# Altium PCB Node_ADE.PcbDoc
Units mil, origin at the board's own origin, x right, y up, seen from the top; angles counter-clockwise.
Board outline 4090 x 5110 mil, 2 copper layers (Top Layer, Bottom Layer); 40 components, 34 nets, 123 pads, 0 vias.
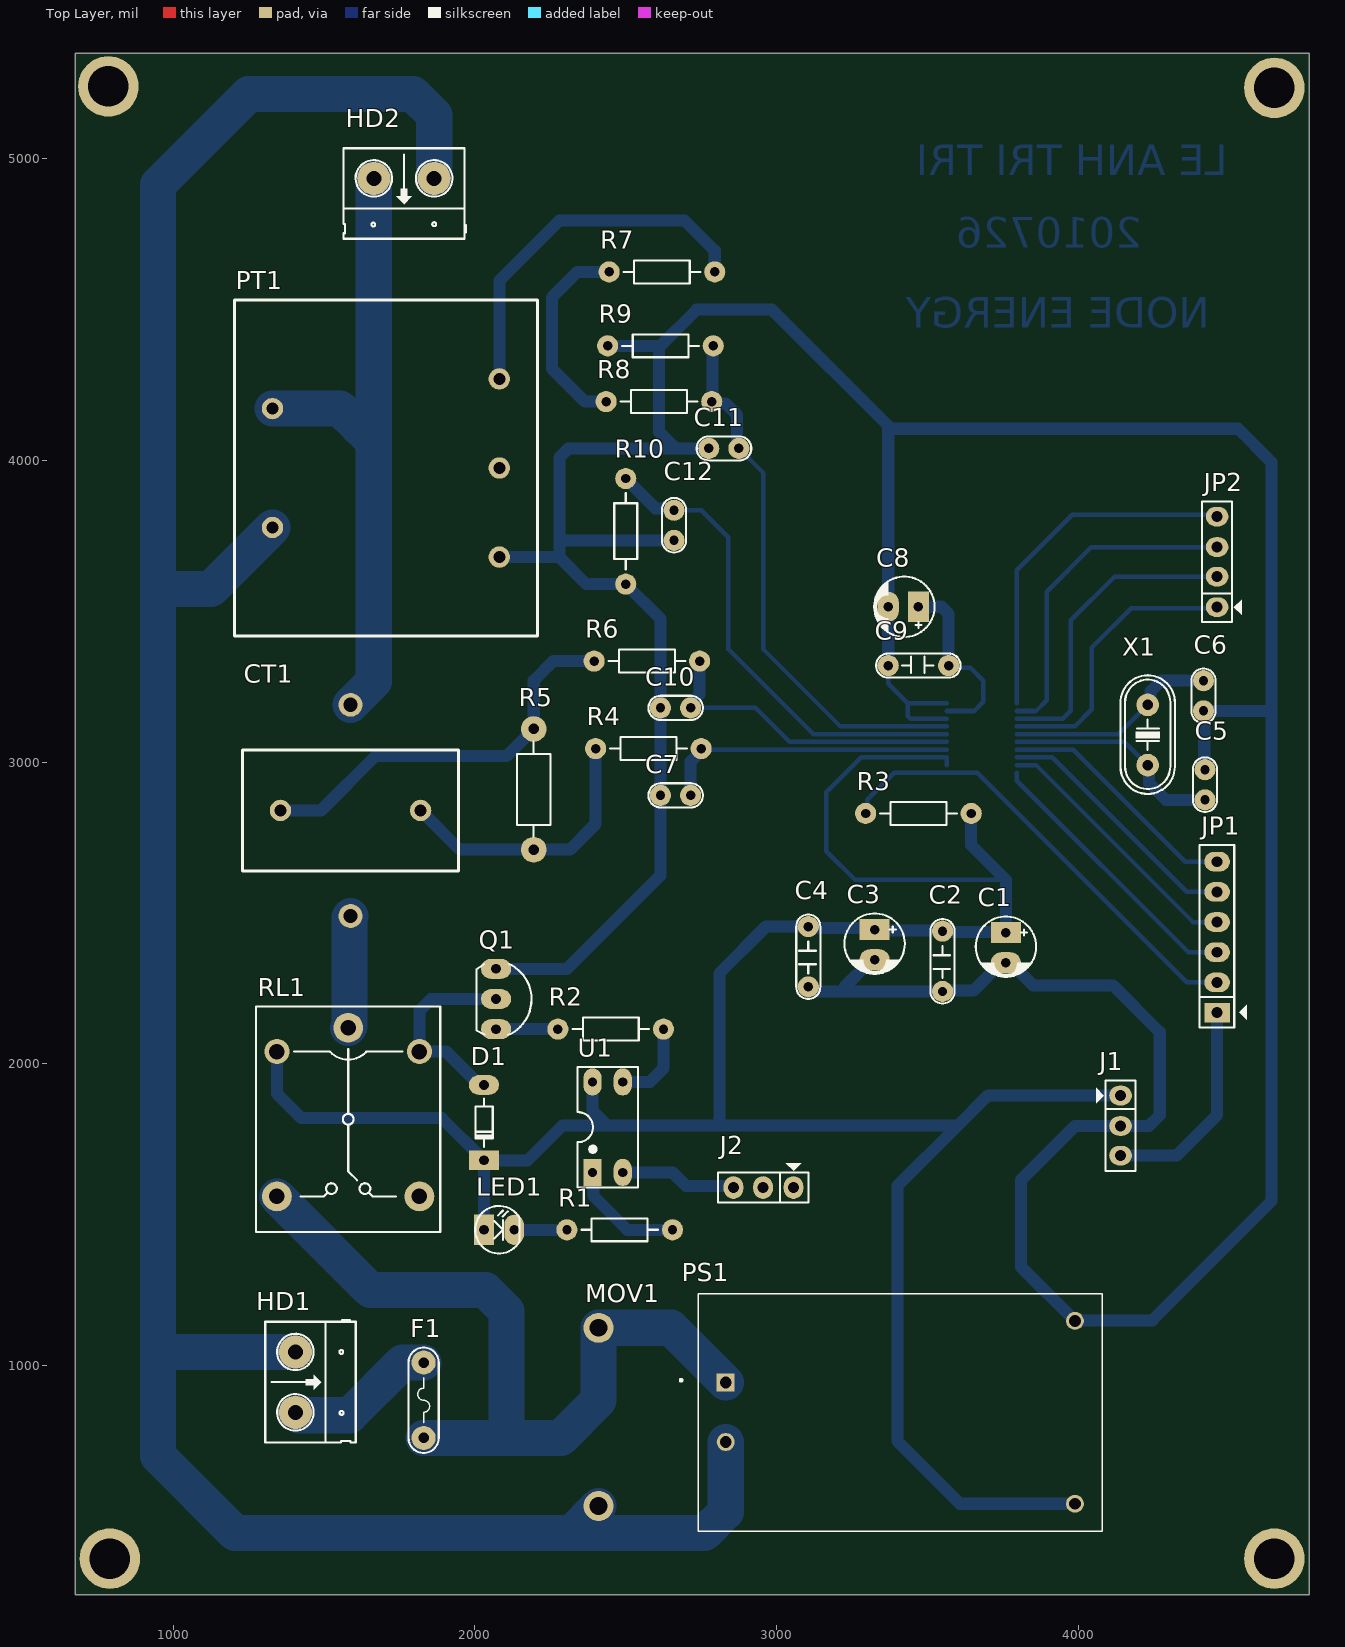
[diagram p0: Top Layer view]
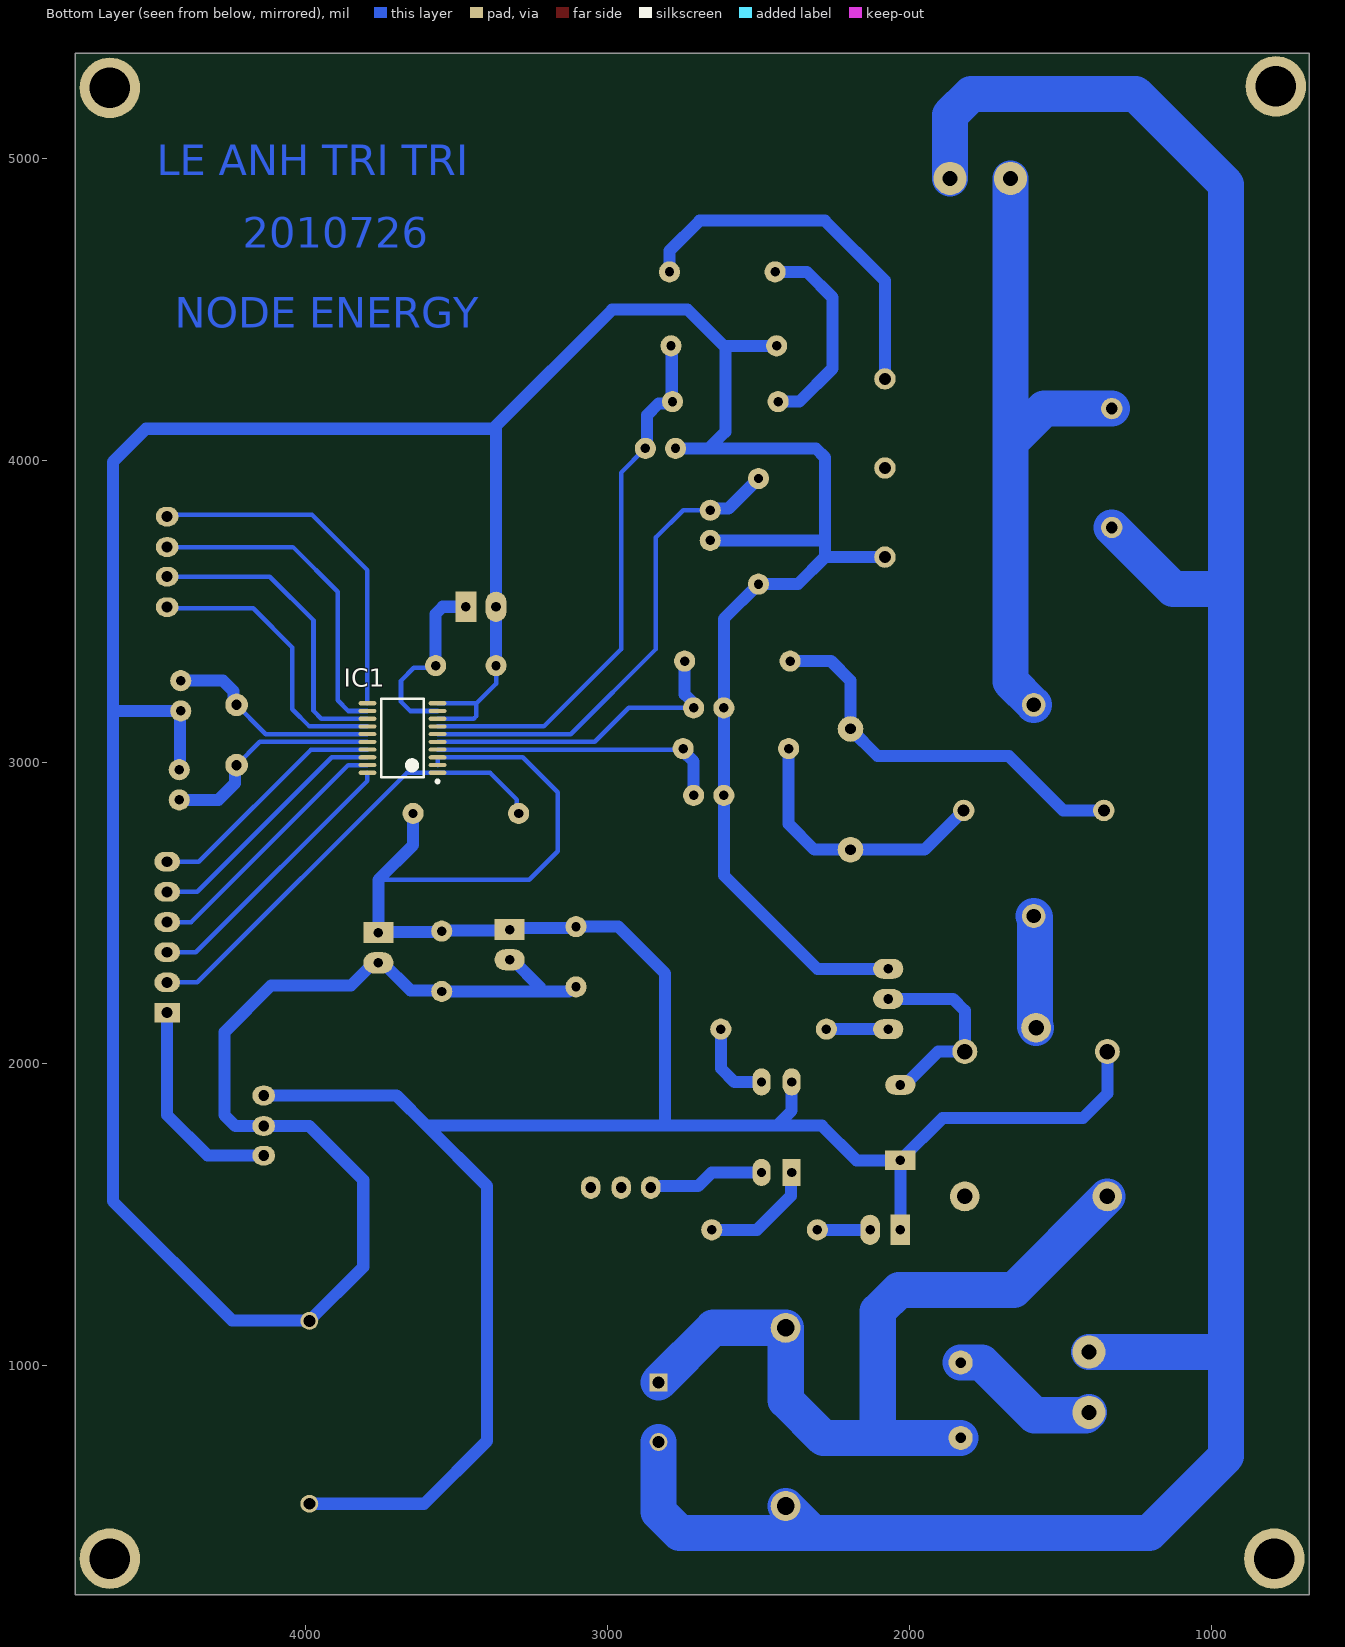
[diagram p1: Bottom Layer view, seen from below]
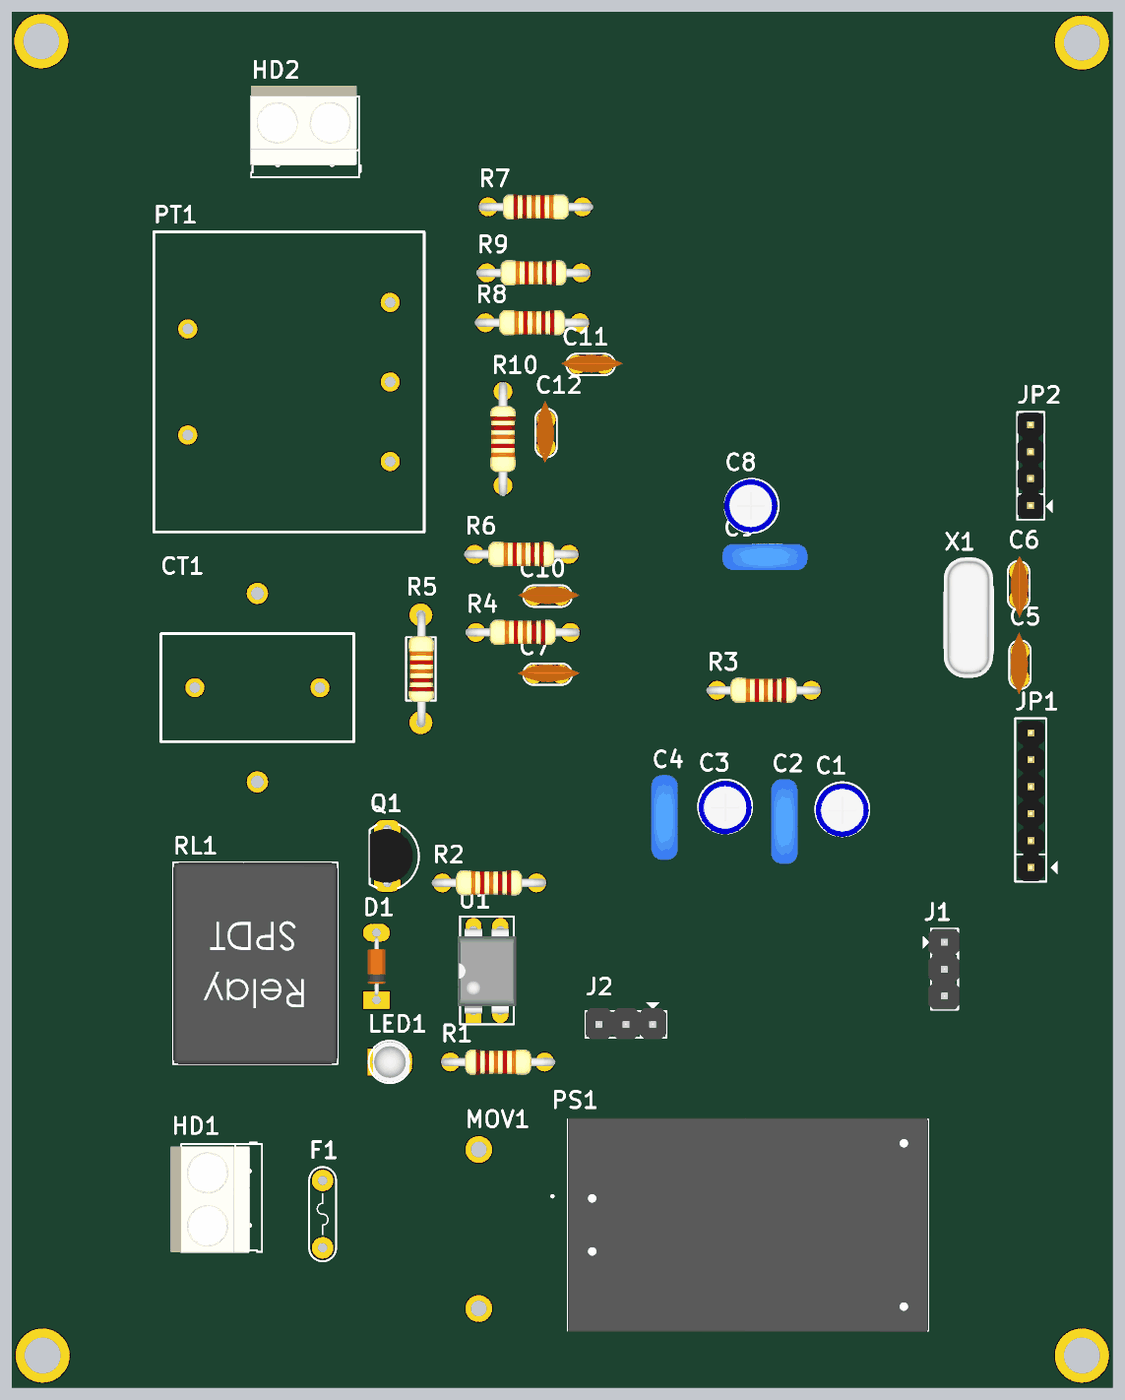
[diagram p2: 3D render of the assembled board from above, using the file's embedded part models]

## Layer stack, top to bottom
Top Solder: solder mask 0.4, Solder Resist, Dk 3.5
Top Layer: signal copper 1.4
Dielectric 1: dielectric 12.6, FR-4, Dk 4.8
Bottom Layer: signal copper 1.4
Bottom Solder: solder mask 0.4, Solder Resist, Dk 3.5

## Board outline
675,240 4765,240 4765,5350 675,5350

## Design rules (kind name [scope] priority, off if disabled: settings)
Clearance [All] p1: gap=10 ignorepadtopadclearanceinfootprint=FALSE except(0: Arc-Hole Track-Hole SMDPad-Hole THPad-Hole Via-Hole Fill-Hole Poly-Hole Region-Hole Text-Hole)
PolygonConnect [All] p1: connectstyle=Relief reliefconductorwidth=10 reliefentries=4 polygonreliefangle="90 Angle" airgapwidth=10
RoutingVias [All] p1: holewidth=28 width=50 viastyle="Through Hole" minholewidth=28 minwidth=50 maxholewidth=28 maxwidth=50
SolderMaskExpansion [All] p1: expansion=4 istentingtop=FALSE
Width [All] p1: maxlimit=200 minlimit=15 preferedwidth=40
30 further rules are at their usual default settings.

## Components (designator, comment, footprint, x,y, rotation, side; value= is the part's Value field where it differs from the comment)
C1 "10uF" CP1/2 3760,2435 r270 top value=10uF/50V
C2 "104" CN2 3550,2240 r90 top value=0.1uF
C3 "10uF" CP1/2 3325,2445 r270 top value=10uF/50V
C4 "104" CN2 3105,2255 r90 top value=0.1uF
C5 "22pF" CN1 4420,2875 r90 top value=33pF
C6 "22pF" CN1 4415,3270 r270 top value=33pF
C7 "33nF" CN1 2615,2890 r0 top value=33pF
C8 "10uF" CP1/2 3470,3515 r180 top value=10uF/50V
C9 "104" CN2 3370,3320 r0 top value=0.1uF
C10 "33nF" CN1 2615,3180 r0 top value=33pF
C11 "33nF" CN1 2775,4040 r0 top value=33pF
C12 "33nF" CN1 2660,3735 r90 top value=33pF
CT1 "ZMCT103C" ZMCT103C 1587.72,2840 r180 top
D1 "1N4148" D0.5A 2030,1805 r90 top
F1 "F3A" FUSE2 1830,1010 r270 top value=Fuse
HD1 "Header 2" HED2 1405,1045 r270 top
HD2 "Header 2" HED2 1865,4935 r180 top
IC1 "ADE7753" TSOP65-20BN 3680,3080 r0 bottom
J1 "Jumper 3" JP3 4140,1795 r270 top value=J3
J2 "Jumper 3" JP3 2956,1590 r180 top value=J3
JP1 "JP6 PIN" JP6 4460,2170 r90 top value=JP7
JP2 "JP4 PIN" JP4 4460,3614 r90 top value=JP4
LED1 "LED" LED-3 2030,1450 r0 top value="LED 3 ly Single Colour"
MOV1 "0.1uF 275V" CAP_1uF 2410,1125 r270 top value=0.1uF
PS1 "HLK-PM01" CONV_HLK-PM01 3410,845 r0 top
PT1 "ZN28120BA1" ZN28120BA1 1705,3975 r0 top
Q1 "C1815" QTO-92 2070,2215 r270 top
R1 "1k" R1/4W 2655,1450 r180 top value="R1/4W - 1K"
R2 "1k" R1/4W 2275,2115 r0 top value="R1/4W - 1K"
R3 "1k" R1/4W 3295,2830 r0 top value="R1/4W - 1K"
R4 "1k" R1/4W 2400,3045 r0 top value="R1/4W - 1K"
R5 "10R" R1/2W 2195,3110 r270 top value="R1/4W - 1K"
R6 "1k" R1/4W 2395,3335 r0 top value="R1/4W - 1K"
R7 "47k" R1/4W 2795,4625 r180 top value="R1/4W - 1K"
R8 "47k" R1/4W 2435,4195 r0 top value="R1/4W - 1K"
R9 "1k" R1/4W 2440,4380 r0 top value="R1/4W - 1K"
R10 "1k" R1/4W 2500,3590 r90 top value="R1/4W - 1K"
RL1 "Relay 10A/12V" RL_SPDT_10A 1580,1840 r270 top value="Relay SPDT, 10A, 12V"
U1 "PC817" DIP4/W0.3 2390,1640 r0 top
X1 "3.58Mhz" XT2 4230,3090 r270 top value=4Mhz

## Footprints (in the part's own frame and the unit in brackets; to place one, negate y for a bottom-side part, rotate by r counter-clockwise, add the part's x,y. Pads: shape width x height; smd on the part's side, far side on the other; paste and mask are expansions set on the pad)
CAP_1uF [mm]
  round 2.524 hole 1.5: 1(0,0) 2(15,0)
CN1 [mil]
  round 70 hole 31: 1(0,0) 2(100,0)
  silkscreen extent -40,-40 141,40, body extent -60,-30 170,37, height 265
CN2 [mil]
  round 70 hole 31: 1(0,0) 2(200,0)
  silkscreen extent -40,-40 240,40, body extent -54,-44 260,55, height 407
CONV_HLK-PM01 [mm]
  rect 1.508x1.508 / inner round 1.508 / far side rect 1.508x1.508 hole 1: 1(-14.7,2.5)
  round 1.508 hole 1: 2(-14.7,-2.5) 3(14.7,7.7) 4(14.7,-7.7)
  silkscreen extent -18.55,-10 17,10, body extent -17,-10.1 17,10.1, height 15
CP1/2 [mil] "Tu hoa < 22uF/16>50V"
  rect 70x100 hole 32: 1(0,0)
  oval 70x100 hole 32: 2(100,0)
  silkscreen extent -53,-100 146,100, body extent -49,-99 149,99, height 287
D0.5A [mil] "Diode muoi, W 80mil, L 300mil"
  oval 65x100 hole 32: 1(125,0)
  rect 65x100 hole 32: 2(-125,0)
  silkscreen extent -80,-30 80,28, body extent -108,-33 108,32, height 61
DIP4/W0.3 [mil] "4 PIN, W 300mil, Pin to pin 100mil"
  rect 60x90 hole 31: 1(0,0)
  oval 60x90 hole 31: 2(100,0) 3(100,300) 4(0,300)
  silkscreen extent -50,-50 150,350, body extent -59,-10 159,305, height 170
FUSE2 [mil] "Fuse"
  round 80 hole 35: 1(0,0) 2(250,0)
  silkscreen extent -50,-50 300,50
HED2 [mil] "Header 2, 2 pin, hight 300mil, Pin to Pin 200, Colour Green"
  round 110 hole 50: 1(0,0) 2(200,0)
  silkscreen extent -106,-100 300,200, body extent -92,-140 302,155, height 394
JP3 [mil] "Jumper 3"
  oval 65x75 hole 36: 1(-100,0) 2(1,0) 3(99,0)
  silkscreen extent -150,-81 150,50, body extent -150,-60 150,55, height 355
JP4 [mil] "Jumper 4"
  oval 65x75 hole 36: 1(-100,0) 2(1,0) 3(99,0) 4(200,0)
  silkscreen extent -150,-81 250,50, body extent -148,-48 248,50, height 323
JP6 [mil] "JP6"
  rect 65x85 hole 36: 1(0,0)
  oval 65x85 hole 36: 2(100,0) 3(200,0) 4(300,0) 5(400,0) 6(500,0)
  silkscreen extent -50,-99 556,58, body extent -48,-50 548,48, height 323
LED-3 [mil] "LED 2 PIN, 3ly Only colour"
  rect 65x100 hole 32: 1(0,0)
  oval 65x100 hole 32: 2(100,0)
  silkscreen extent -29,-78 118,79, body extent -13,-75 125,75, height 217
QTO-92 [mil] "TO-92"
  oval 66x100 hole 32: 1(-100,0) 2(0,0) 3(100,0)
  silkscreen extent -117,-65 120,118, body extent -109,-66 109,95, height 245
R1/2W [mil] "R 1/2W, 2 pin, 300mil"
  round 85 hole 35: 1(0,0) 2(400,0)
  silkscreen extent 42,-55 356,55, body extent -12,-45 414,49, height 91
R1/4W [mil] "R 1/4W, 2 Pin, 350mil"
  round 70 hole 31: 1(0,0) 2(350,0)
  silkscreen extent 48,-38 302,38, body extent -40,-47 386,47, height 111
RL_SPDT_10A [mm] "Relay SPDT, 5 pin, 10A,W 650mil, L 800mil, H 800mil"
  round 2.5 hole 1.3: 1(-7.1,0) 2(7.1,-6) 3(7.1,6)
  round 2.1 hole 1.3: 4(-5.1,-6) 5(-5.1,6)
  silkscreen extent -8.9,-7.75 10.1,7.75, body extent -8.9,-7.75 10.1,7.75, height 15.4
TSOP65-20BN [mm] "TSOP, 20-Leads, Body 6.5x4.4mm, Pitch 0.65mm, IPC Medium Density"
  oval 1.5x0.35 smd: 1(-2.95,2.925) 2(-2.95,2.275) 3(-2.95,1.625) 4(-2.95,0.975) 5(-2.95,0.325) 6(-2.95,-0.325) 7(-2.95,-0.975) 8(-2.95,-1.625) 9(-2.95,-2.275) 10(-2.95,-2.925) 11(2.95,-2.925) 12(2.95,-2.275) 13(2.95,-1.625) 14(2.95,-0.975) 15(2.95,-0.325) 16(2.95,0.325) 17(2.95,0.975) 18(2.95,1.625) 19(2.95,2.275) 20(2.95,2.925)
  silkscreen extent -3.07,-3.3 1.8,3.77, body extent -2.25,-3.3 2.25,3.3, height 1.2
XT2 [mil] "Footpin for Crystal 2 pin"
  round 75 hole 34: 1(-100,0) 2(100,0)
  silkscreen extent -198,-90 195,90, body extent -233,-93 213,90, height 138
ZMCT103C [mm]
  round 2 hole 1.2: 1(0,8.89) 2(0,-8.89)
  round 1.8 hole 1: 3(-5.9,0) 4(5.9,0)
  silkscreen extent -9.1,-5.1 9.1,5.1
ZN28120BA1 [mm]
  round 1.8 hole 1: 1(-9.55,5) 2(-9.55,-5.006) 3(9.55,-7.5) 4(9.55,0) 5(9.55,7.5)
  silkscreen extent -12.75,-14.15 12.75,14.15

## Part data
C1 C3 C8: library part CP1, "Cap P  0,1uF < 22uF , 16 - 50V", Description 1="10 => 220uF/6,3V/10V - 10uF => 100uF/16V", Description 2="0,1uF => 33uF/50V - 10uF => 22uF/63V", Description 3="0,47uF => 10uF/100V"
C2 C4 C9: library part CN2, "Cap np 104 => 105pF"
C5 C6 C7 C10 C11 C12: library part CN0, "Cremic For Xtal 1pF => 100pF"
CT1: "ZMCT103C Current Transformer 1000:1 5A/5mA"
D1: library part D0.5A, "D0.5A"
F1: library part Fuse, "Fuse", Designed by=VanDungEvn
HD1 HD2: library part Hed2, "Header 2 (Green)"
IC1: "Single-Phase Multifunction Metering IC with di/dt Sensor Interface"
J1 J2: library part JP3
JP1: library part JP6
JP2: library part JP4
LED1: "LED Single colour Green and Red"
MOV1: library part "Cap DIP", "Capacitor 0.1uF 275V"
PS1: "The HLK-PM01 is a small size low cost AC to DC converter which can take in 110V/220V AC at 50/60 Hz and give 5V 3W output. The module is can be used in designs which run on 5V and needs to be powered form the AC mains.", Package=None, Availability="Not in stock", Check_prices=https://www.snapeda.com/parts/hlk-pm01/Hi-link/view-part/?ref=eda, MF=Hi-link, MP=hlk-pm01, Price=None, SnapEDA_Link=https://www.snapeda.com/parts/hlk-pm01/Hi-link/view-part/?ref=snap
PT1: library part "EI28 ZN28120BA1", "220VAC / 12VAC EI28 ZN28120BA1"
Q1: "NPN 600mW, ECB"
R1 R2 R3 R4 R5 R6 R7 R8 R9 R10: library part R1/4W, "Resistor 1/4W"
RL1: library part "Relay 1", "Relay SPDT,10A - 12VDC 5 Pin"
U1: "Single Opto"
X1: library part XT2, "Crystal For all Crystal 2pin."

## Free pads (board coordinates)
  round 200.79 hole 133.86: 2(785,5240) 2(790,360) 2(4650,360) 2(4650,5235)

## Nets (pads, with @x,y where several pads share a name; then routed paths per layer and width w, separated by ;. In a path a pad name is that pad's centre, name@x,y a point inside that pad or via, vN(x,y) a via of type N, cw(c..) or ccw(c..) an arc to the next point about the centre after c; other vN are vias at no path point)
AGND: C1.2 C2.1 C3.2 C4.1 C5.2 C6.2 C7.1 C8.2 C9.1 C10.1 C11.1 C12.1 IC1.8 IC1.10 J1.2 PS1.3 PT1.3 Q1.1 R9.1 R10.1 | length 13949.8
  Bottom Layer w15: C9.1 3370,3260 3434.84,3195.16 ; IC1.8 3443.63,3143.98 3434.84,3152.76 3434.84,3195.16 ; IC1.10 3434.84,3195.16
  Bottom Layer w40: Q1.1 2305,2315 2615,2625 C7.1 2615,3475 R10.1 2369.45,3590 2279.72,3679.72 ; PT1.3 2279.72,3679.72 ; R9.1 2615,4380 2735,4500 2985,4500 3380,4105 ; 2610,4380 2610,4095 2665,4040 ; C12.1 2280,3735 2279.72,3734.72 ; C11.1 2665,4040 ; C4.1 3113.12,2255 3128.12,2240 3240,2240 ; C3.2 3315,2345 3225,2255 3240,2240 ; C9.1 C8.2 3370,4105 4530,4105 4640,3995 4640,3170 ; C5.2 4417.5,2977.5 4417.5,3167.5 C6.2 4640,3170 ; 2279.72,3679.72 2279.72,3734.72 ; 2279.72,3734.72 2279.72,4009.72 2310,4040 2665,4040 ; 3240,2240 C2.1 3553.12,2243.12 3653.12,2243.12 3745,2335 C1.2 3775,2335 3850,2260 4115,2260 4270,2105 4270,1830 4234,1794 J1.2 3989,1794 3810,1615 3810,1326.89 PS1.3 3990.59,1150 4245,1150 4640,1545 4640,3170
CF: IC1.11 JP2.4 | length 1183.5
  Bottom Layer w15: IC1.11 3796.14,3636.14 3980,3820 4454,3820 JP2.4
CLKIN: C6.1 IC1.15 X1.1 | length 712.8
  Bottom Layer w15: IC1.15 4132.8,3092.8 X1.1@4239.93,3199.93
  Bottom Layer w40: X1.1@4239.93,3199.93 4239.93,3234.93 4275,3270 C6.1
CLKOUT: C5.1 IC1.16 X1.2 | length 735.7
  Bottom Layer w15: IC1.16 4152.8,3067.2 X1.2 X1.2@4235,2985
  Bottom Layer w40: X1.2@4235,2985 4235,2930 4290,2875 C5.1
CS: IC1.17 JP1.6 | length 817.8
  Bottom Layer w15: IC1.17 3983.39,3041.61 4355,2670 JP1.6
IRQ: IC1.14 JP2.1 | length 947.8
  Bottom Layer w15: IC1.14 3988.39,3118.39 4045,3175 4045,3380 4175,3510 4456,3510 JP2.1
MISO: IC1.19 JP1.4 | length 879.4
  Bottom Layer w15: IC1.19 3859.57,2990.43 4380,2470 JP1.4
MOSI: IC1.20 JP1.3 | length 925.5
  Bottom Layer w15: IC1.20 3796.14,2938.86 4365,2370 JP1.3
NetC8_1: C8.1 C9.2 IC1.9 | length 620.7
  Bottom Layer w15: IC1.9 3654.57,3169.57 3685,3200 3685,3270 3642.5,3312.5 3577.5,3312.5 C9.2
  Bottom Layer w40: C8.1 3546.57,3515 3570,3491.57 C9.2
NetCT1_1: CT1.1 RL1.1 | length 373.7
  Bottom Layer w120: RL1.1 1583.86,2123.39 1583.86,2486.14 CT1.1
NetCT1_2: CT1.2 HD2.2 PT1.1 | length 2123.1
  Bottom Layer w120: PT1.1 1553.15,4171.85 1613.64,4111.36 1650,4075 ; CT1.2 1665,3267.28 1665,4230 ; 1665,4245 HD2.2
NetCT1_3: CT1.3 R4.1 R5.2 | length 919.1
  Bottom Layer w40: CT1.3 1950,2710 R5.2 2315,2710 2400,2795 R4.1
NetCT1_4: CT1.4 R5.1 R6.1 | length 1338.3
  Bottom Layer w40: CT1.4 1490,2840 1670,3020 2105,3020 R5.1 2195,3270 2260,3335 R6.1
NetD1_1: D1.1 Q1.2 RL1.5 | length 664.9
  Bottom Layer w40: D1.1 2015,1930 1904.21,2040.79 RL1.5 1816.22,2176.22 1855,2215 Q1.2
NetF1_1: F1.1 HD1.2 | length 501.6
  Bottom Layer w120: HD1.2 1415,835 1585,835 1760,1010 F1.1
NetF1_2: F1.2 MOV1.1 PS1.1 RL1.2 | length 2706.9
  Bottom Layer w120: RL1.2 1654.25,1250 2034.71,1250 2105,1179.71 2105,760 ; F1.2 2040.56,760 2105,760 ; PS1.1 2649.68,1125 MOV1.1 2410,885 2285,760 2105,760
NetHD1_1: HD1.1 HD2.1 MOV1.2 PS1.2 PT1.2 | length 8742.6
  Bottom Layer w120: 990,1045 HD1.1 ; PT1.2 1125,3573.9 950,3573.9 ; HD2.1 1865,5144.71 1794.71,5215 1250,5215 950,4915 950,3573.9 ; 2322.55,447 MOV1.2 ; PS1.2 2831.26,515.29 2760.97,445 2322.55,445 1205,445 950,700 950,1045 950,3573.9
NetJ2_3: J2.3 U1.2 | length 387.7
  Bottom Layer w40: U1.2 2655,1640 2700,1595 2852,1595 J2.3
NetLED1_2: LED1.2 R1.2 | length 175
  Bottom Layer w40: LED1.2 R1.2
NetPT1_5: PT1.5 R7.1 | length 1233.6
  Bottom Layer w40: PT1.5 2080.98,4595.98 2280,4795 2695,4795 2795,4695 R7.1
NetQ1_3: Q1.3 R2.1 | length 205
  Bottom Layer w40: Q1.3 R2.1
NetR1_1: R1.1 U1.1 | length 387.6
  Bottom Layer w40: U1.1 2392.43,1637.57 2392.43,1562.57 2505,1450 R1.1
NetR2_2: R2.2 U1.3 | length 283.6
  Bottom Layer w40: U1.3 2580,1940 2625,1985 R2.2
NetR7_2: R7.2 R8.1 | length 685.8
  Bottom Layer w40: R8.1 2365,4195 2255,4305 2255,4540 2340,4625 R7.2
RELAY: J1.3 JP1.1 | length 715.5
  Bottom Layer w40: J1.3 4326,1696 4460,1830 JP1.1
RESET: IC1.1 JP1.2 R3.1 | length 1532.1
  Bottom Layer w15: R3.1 3300.66,2835.66 3300.66,2875.66 3389.84,2964.84 IC1.1 3665.16,2964.84 4360,2270 JP1.2
SAG: IC1.13 JP2.2 | length 1034.7
  Bottom Layer w15: IC1.13 3948.98,3143.98 3975,3170 3975,3470 4120,3615 JP2.2
SCK: IC1.18 JP1.5 | length 848.6
  Bottom Layer w15: IC1.18 3913.98,3016.02 4360,2570 JP1.5
V1N: C10.2 IC1.5 R6.2 | length 1063
  Bottom Layer w15: C10.2@2715,3194.88 C10.2 2930,3180 3042.8,3067.2 IC1.5
  Bottom Layer w40: C10.2@2715,3194.88 2745,3224.88 R6.2
V1P: C7.2 IC1.4 R4.2 | length 984.8
  Bottom Layer w15: R4.2 2753.39,3041.61 IC1.4
  Bottom Layer w40: C7.2 2715,3001.88 2750,3036.88 R4.2
V2N: C12.2 IC1.6 R10.2 | length 1631.5
  Bottom Layer w15: C12.2 2750,3835 2840,3745 2840,3375 3122.2,3092.8 IC1.6
  Bottom Layer w40: R10.2 2599.26,3840.74 2654.26,3840.74 C12.2
V2P: C11.2 IC1.7 R8.2 R9.2 | length 1816.1
  Bottom Layer w15: C11.2 2955,3960 2955,3375 3211.61,3118.39 IC1.7
  Bottom Layer w40: R9.2 2787.5,4377.5 2787.5,4197.5 R8.2 2790.74,4189.26 2830.74,4189.26 2869.26,4150.74 2869.26,4045.74 C11.2
VCC: C1.1 C2.2 C3.1 C4.2 D1.2 IC1.2 IC1.3 J1.1 LED1.1 PS1.4 R3.2 RL1.4 U1.4 | length 8587
  Bottom Layer w15: IC1.2 IC1.3 3281.02,3016.02 3165,2900 3165,2705 3260,2610 3760,2610
  Bottom Layer w40: RL1.4 1343.78,1901.22 1425,1820 1890,1820 D1.2 ; LED1.1 D1.2 ; U1.4 2390,1845 2440,1795 ; R3.2 3645,2725 3760,2610 C1.1 3757.5,2437.5 3552.5,2437.5 C2.2 3547.5,2442.5 3327.5,2442.5 C3.1 3320,2450 3110,2450 C4.2 2965,2455 2810,2300 2810,1795 ; PS1.4 3608.15,541.85 3400,750 3400,1595 3600,1795 ; J1.1 3700,1895 3600,1795 ; D1.2 2175,1680 2290,1795 2440,1795 ; 2440,1795 2810,1795 ; 2810,1795 3600,1795
ZX: IC1.12 JP2.3 | length 1099.8
  Bottom Layer w15: IC1.12 3859.57,3169.57 3895,3205 3895,3565 4043,3713 JP2.3
pads on no net: J2.1 J2.2 PT1.4 RL1.3

## Other copper
Bottom Layer:
  text "LE ANH TRI TRI" at 4495,4945 h100
  text "2010726" at 4210,4705 h100
  text "NODE ENERGY" at 4435,4440 h100